# Altium PCB IMTM-Left-PCB04.PcbDoc
Units mm, origin at the board's own origin, x right, y up, seen from the top; angles counter-clockwise.
Board outline 206.22 x 62.12 mm, 2 copper layers (Top Layer, Bottom Layer), stack 0.096 mm thick; 6 components, 7 nets, 14 pads, 0 vias.
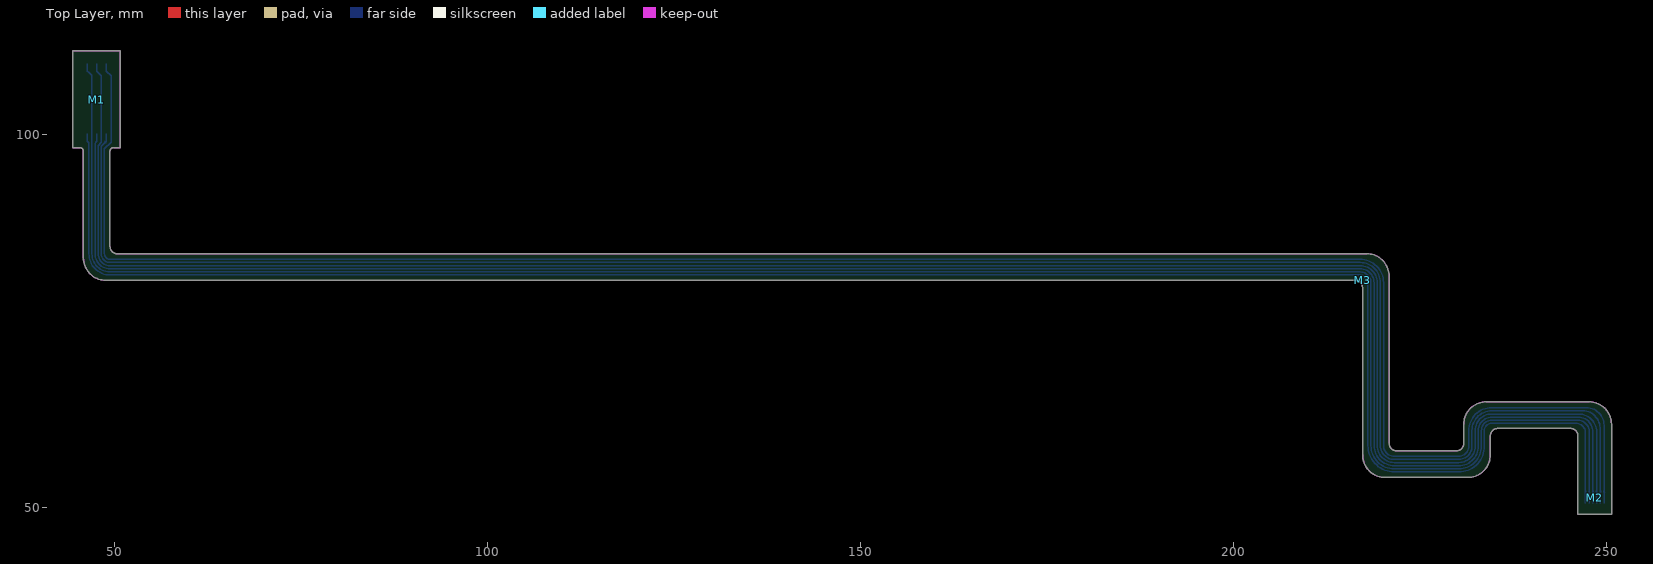
[diagram p0: Top Layer view]
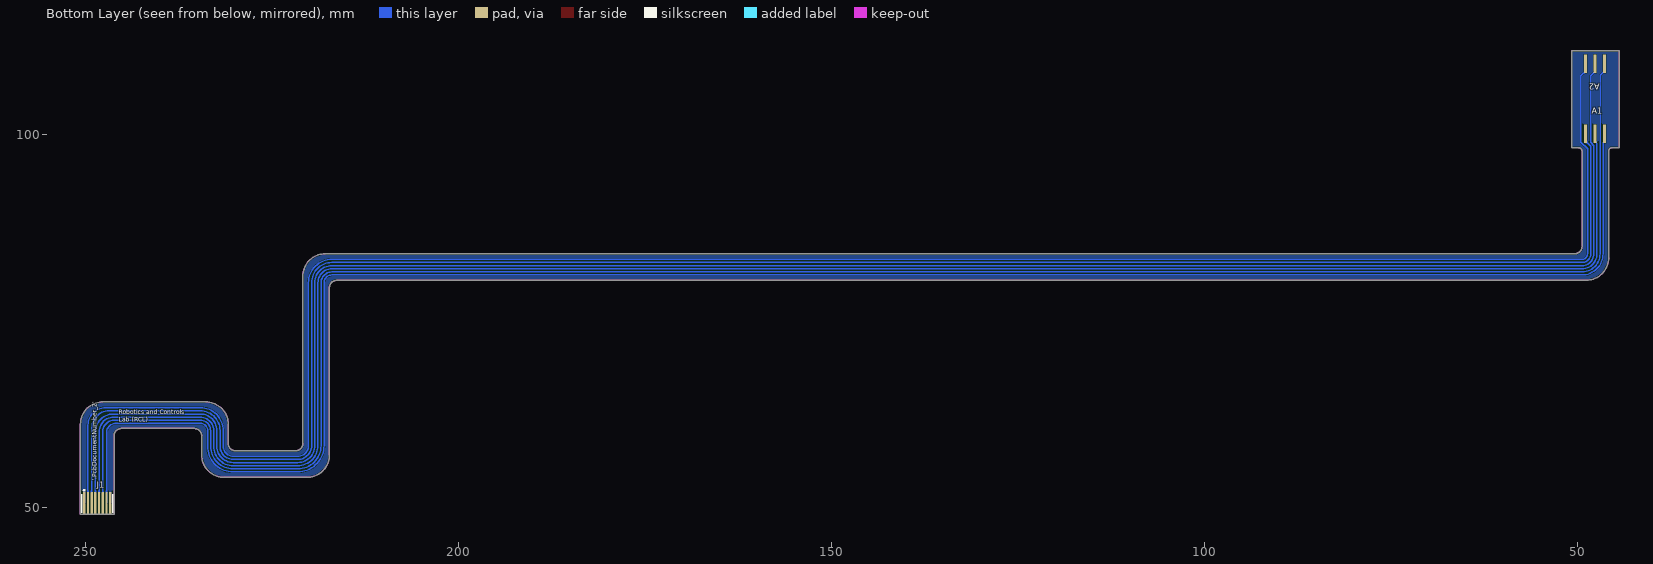
[diagram p1: Bottom Layer view, seen from below]

## Layer stack, top to bottom
Flex Top Coverlay: solder mask 0.05, PI + Adhesive, Dk 3.4
Top Layer: signal copper 0.0356
Polyimide: dielectric 0.025, Adhesive + PI, Dk 3.4
Bottom Layer: signal copper 0.0356
Flex Bottom Coverlay: solder mask 0.05, PI + Adhesive, Dk 3.4

## Board outline
48.808,80.431 cw(c48.808,83.431) 45.808,83.431 45.808,97.711 ccw(c45.308,97.711) 45.308,98.211 44.411,98.211 44.411,111.165 50.761,111.165 50.761,98.211 49.864,98.211 ccw(c49.864,97.711) 49.364,97.711 49.364,84.987 ccw(c50.364,84.987) 50.364,83.987 217.814,83.987 cw(c217.814,80.987) 220.814,80.987 220.814,58.571 ccw(c221.814,58.571) 221.814,57.571 229.814,57.571 ccw(c229.814,58.571) 230.814,58.571 230.814,61.131 cw(c233.814,61.131) 233.814,64.131 247.626,64.131 cw(c247.626,61.131) 250.626,61.131 250.626,49.043 246.126,49.043 246.126,59.571 ccw(c245.126,59.571) 245.126,60.571 235.374,60.571 ccw(c235.374,59.571) 234.374,59.571 234.374,57.015 cw(c231.374,57.015) 231.374,54.015 220.258,54.015 cw(c220.258,57.015) 217.258,57.015 217.258,79.431 ccw(c216.258,79.431) 216.258,80.431
board region FPC: 250.626,53.537 250.626,49.043 246.126,49.043 246.126,53.537
board region HLE: 45.808,97.211 45.808,97.711 45.798,97.809 45.724,97.989 45.586,98.127 45.406,98.201 45.308,98.211 44.411,98.211 44.411,111.165 50.761,111.165 50.761,98.211 49.864,98.211 49.766,98.201 49.586,98.127 49.448,97.989 49.374,97.809 49.364,97.711 49.364,97.211
board region Flex2: 220.814,73.5 220.814,58.571 220.819,58.473 220.857,58.281 220.932,58.1 221.041,57.937 221.18,57.798 221.343,57.689 221.524,57.614 221.716,57.576 221.814,57.571 229.814,57.571 229.912,57.576 230.104,57.614 230.285,57.689 230.448,57.798 230.587,57.937 230.696,58.1 230.771,58.281 230.809,58.473 230.814,58.571 230.814,61.131 230.814,61.328 230.865,61.718 230.967,62.097 231.118,62.461 231.314,62.801 231.554,63.113 231.832,63.391 232.144,63.631 232.484,63.827 232.848,63.978 233.227,64.08 233.617,64.131 233.814,64.131 247.626,64.131 247.823,64.131 248.213,64.08 248.592,63.978 248.956,63.827 249.296,63.631 249.608,63.391 249.886,63.113 250.126,62.801 250.322,62.461 250.473,62.097 250.575,61.718 250.626,61.328 250.626,61.131 250.626,60.571 245.126,60.571 235.374,60.571 235.276,60.566 235.084,60.528 234.903,60.453 234.74,60.344 234.601,60.205 234.492,60.042 234.417,59.861 234.379,59.669 234.374,59.571 234.374,57.015 234.374,56.818 234.323,56.428 234.221,56.049 234.07,55.685 233.874,55.345 233.634,55.033 233.356,54.755 233.044,54.515 232.704,54.319 232.34,54.168 231.961,54.066 231.571,54.015 231.374,54.015 220.258,54.015 220.061,54.015 219.671,54.066 219.292,54.168 218.928,54.319 218.588,54.515 218.276,54.755 217.998,55.033 217.758,55.345 217.562,55.685 217.411,56.049 217.309,56.428 217.258,56.818 217.258,57.015 217.258,73.501
board region Flex1: 246.126,53.537 246.126,59.571 246.121,59.669 246.083,59.861 246.008,60.042 245.899,60.205 245.76,60.344 245.597,60.453 245.416,60.528 245.224,60.566 245.126,60.571 250.626,60.571 250.626,53.537
board region Flex2: 210.097,80.431 48.808,80.431 48.611,80.431 48.221,80.482 47.842,80.584 47.478,80.735 47.138,80.931 46.826,81.171 46.548,81.449 46.308,81.761 46.112,82.101 45.961,82.465 45.859,82.844 45.808,83.234 45.808,83.431 45.808,97.211 49.364,97.211 49.364,84.987 49.369,84.889 49.407,84.697 49.482,84.516 49.591,84.353 49.73,84.214 49.893,84.105 50.074,84.03 50.266,83.992 50.364,83.987 210.1,83.987
board region Flex2: 217.258,73.501 217.258,79.431 217.253,79.529 217.215,79.721 217.14,79.902 217.031,80.065 216.892,80.204 216.729,80.313 216.548,80.388 216.356,80.426 216.258,80.431 210.097,80.431 210.1,83.987 217.814,83.987 218.011,83.987 218.401,83.936 218.78,83.834 219.144,83.683 219.484,83.487 219.796,83.247 220.074,82.969 220.314,82.657 220.51,82.317 220.661,81.953 220.763,81.574 220.814,81.184 220.814,80.987 220.814,73.5

## Design rules (kind name [scope] priority, off if disabled: settings)
Clearance [All] p1: gap=0.1 ignorepadtopadclearanceinfootprint=FALSE
ComponentClearance [All] p1: gap=0.1 collisioncheckmode=3 verticalgap=0.254 showdistances=FALSE
FabricationTestPointUsage TestPointUsage [All] p1: valid=0 allowmultiple=FALSE
FabricationTestpoint Testpoint [All] p1: side=3 testpointundercomponent=TRUE minsize=1.016 maxsize=2.54 preferedsize=1.524 minholesize=0 maxholesize=1.016 preferedholesize=0.813 testpointgrid=0.025 allowsidetop=TRUE allowsidebottom=TRUE usegrid=TRUE gridtolerance=0
PolygonConnect [All] p1: connectstyle=Relief reliefconductorwidth=0.254 reliefentries=4 polygonreliefangle="90 Angle" airgapwidth=0.254
RoutingVias [All] p1: holewidth=0.711 width=1.27 viastyle="Through Hole" minholewidth=0.711 minwidth=1.27 maxholewidth=0.711 maxwidth=1.27
SilkToSolderMaskClearance SilkscreenOverComponentPads [IsPad] p1: minsilkscreentomaskgap=0.254 clearancetoexposedcopper=TRUE
SolderMaskExpansion [All] p1: expansion=0.102
Width [All] p1: maxlimit=0.175 minlimit=0.175 preferedwidth=0.175
26 further rules are at their usual default settings.

## Components (designator, comment, footprint, x,y, rotation, side; value= is the part's Value field where it differs from the comment)
A1 "A1324LUA-T" A1324LUA-T 47.626,100.171 r180 bottom
A2 "A1324LUA-T" A1324LUA-T 47.626,109.371 r0 bottom
J1 "687108182122_matingPad" 687108182122_MATINGPAD 248.376,50.537 r180 bottom
M1 "Stiffener,HLE,PI,0.15mm" HLE_stiffener 47.58,104.633 r0 top
M2 "Stiffener,FPC,PI,0.15mm" FPC_STIFFENER 248.37,51.287 r0 top
M3 "Stiffener,CRN,PI,0.15mm" CRN_STIFFENER 217.258,80.431 r0 top

## Footprints (in the part's own frame and the unit in brackets; to place one, negate y for a bottom-side part, rotate by r counter-clockwise, add the part's x,y. Pads: shape width x height; smd on the part's side, far side on the other; paste and mask are expansions set on the pad)
687108182122_MATINGPAD [mm]
  rect 0.3x3 smd mask+0: 1(-1.75,0) 2(-1.25,0) 3(-0.75,0) 4(-0.25,0) 5(0.25,0) 6(0.75,0) 7(1.25,0) 8(1.75,0)
  silkscreen extent -2.1,-1.25 2.1,1.82
A1324LUA-T [mm]
  rect 0.45x2.5 smd: 1(-1.27,-0.1) 2(0,-0.1) 3(1.27,-0.1)
  body extent -2.1,1.42 2.1,4.5, height 1.57
CRN_STIFFENER [mm]
  body extent -7.15,-6.95 3.55,3.55, height 0.25
FPC_STIFFENER [mm]
  body extent -2.25,-2.25 3,2.25, height 0.25
HLE_stiffener [mm]
  body extent -3.18,-7.42 3.17,6.54, height 0.15

## Part data
A1 A2: "ALLEGRO MICROSYSTEMS - A1324LUA-T - Hall Effect Sensor, Linear, 10 mA, SIP, 3 Pins, 4.5 V, 5.5 V", Case/Package=SIP, Manufacturer="Allegro MicroSystems", Max Operating Temperature=150°C, Max Output Current=10mA, Max Supply Current=9mA, Max Supply Voltage=5.5V, Min Operating Temperature=-40°C, Min Supply Voltage=4.5V, Operating Supply Voltage=5V, Package Quantity=4000, Supplier Part Number 1=620-1432-ND, Category=Sensors, ComponentLink1Description=https://datasheet.ciiva.com/15099/getdatasheetpartid-367817-15099484.pdf?src-supplier=Verical, ComponentLink1URL=https://datasheet.ciiva.com/15099/getdatasheetpartid-367817-15099484.pdf?src-supplier=Verical, ComponentLink2Description=https://datasheet.ciiva.com/22624/1538021-22624823.pdf?src-supplier=Element14, ComponentLink2URL=https://datasheet.ciiva.com/22624/1538021-22624823.pdf?src-supplier=Element14, ComponentLink3Description=https://datasheet.ciiva.com/14094/a1324-26-eng-tds-14094701.pdf?src-supplier=Distrelec, ComponentLink3URL=https://datasheet.ciiva.com/14094/a1324-26-eng-tds-14094701.pdf?src-supplier=Distrelec, Height=3.02mm, Length=4.09mm, Manufacturer Part Number=A1324LUA-T, Mount="Through Hole", Number of Pins=3, Operating Supply Current=9mA, Output Current=10mA, Output Type=Digital, Packaging=Bag, Pricing 1="1=2.00000, 5=1.89000, 10=1.62000, 25=1.29600, 50=1.18800, 100=1.08000, 500=0.94500, 1000=0.83700, 5000=0.78300 (USD)", Radiation Hardening=No, REACH SVHC="No SVHC", RoHS=Yes, Stock 1=15828, Supplier 1=Digi-Key, Width=1.52mm
M1: library part HLE_stiffener, "MECH,Stiffener,IMTM-PCB03_04,HLE", CreatedBy="A. Hadi"
M2: library part FPC_STIFFENER, "MECH,Stiffener,IMTM-PCB03_04,FPC", CreatedBy="A. Hadi"
M3: "MECH,Stiffener,IMTM-PCB03_04,CRN"

## Nets (pads, with @x,y where several pads share a name; then routed paths per layer and width w, separated by ;. In a path a pad name is that pad's centre, name@x,y a point inside that pad or via, vN(x,y) a via of type N, cw(c..) or ccw(c..) an arc to the next point about the centre after c; other vN are vias at no path point)
HLE1_GND: A1.2 J1.5 | length 257.9
  Bottom Layer w0.175: A1.2 47.626,99.046 47.489,98.908 47.472,98.908 47.369,98.806 47.369,83.969 ccw(c49.366,83.969) 49.366,81.973 216.922,81.973 cw(c216.922,80.095) 218.8,80.095 218.8,58.28 ccw(c221.5,58.28) 221.5,55.579 230.156,55.579 ccw(c230.156,58.183) 232.76,58.183 232.76,60.297 cw(c234.551,60.297) 234.551,62.087 246.186,62.087 cw(c246.149,60.11) 248.126,60.11 J1.5
HLE1_VCC: A1.1 J1.3 | length 258.4
  Bottom Layer w0.175: A1.1 48.896,99.046 48.759,98.908 48.715,98.908 48.212,98.405 48.212,83.969 ccw(c49.366,83.969) 49.366,82.816 216.922,82.816 cw(c216.922,80.095) 219.643,80.095 219.643,58.28 ccw(c221.5,58.28) 221.5,56.423 230.156,56.423 ccw(c230.156,58.183) 231.917,58.183 ; 231.917,58.183 231.917,60.297 cw(c234.551,60.297) 234.551,62.931 246.823,62.931 cw(c246.823,60.772) 248.352,62.296 cw(c246.475,60.424) 249.126,60.424 249.126,60.423 J1.3
HLE1_VOUT: A1.3 J1.7 | length 257.6
  Bottom Layer w0.175: A1.3 46.356,99.046 46.547,98.855 46.547,83.969 ccw(c49.366,83.969) 49.366,81.15 216.922,81.15 cw(c216.922,80.095) 217.977,80.095 217.977,58.28 ccw(c221.5,58.28) 221.5,54.757 230.156,54.757 ccw(c230.156,58.183) 233.582,58.183 233.582,60.297 cw(c234.551,60.297) 234.551,61.265 245.847,61.265 cw(c245.847,59.986) 247.126,59.986 J1.7
HLE2_GND: A2.2 J1.4 | length 267.6
  Bottom Layer w0.175: A2.2 47.626,108.446 48.212,107.86 48.212,98.917 47.791,98.495 47.791,83.969 ccw(c49.366,83.969) 49.366,82.394 216.922,82.394 cw(c216.922,80.095) 219.221,80.095 219.221,58.28 ccw(c221.5,58.28) 221.5,56.001 230.156,56.001 ccw(c230.156,58.183) 232.338,58.183 232.338,60.297 cw(c234.551,60.297) 234.551,62.509 246.213,62.509 cw(c246.213,60.096) 248.626,60.096 J1.4
HLE2_VCC: A2.1 J1.6 | length 267.4
  Bottom Layer w0.175: A2.1 46.356,108.446 46.494,108.309 46.537,108.309 46.947,107.898 46.947,83.969 ccw(c49.366,83.969) 49.366,81.551 216.922,81.551 cw(c216.922,80.095) 218.378,80.095 218.378,58.28 ccw(c221.5,58.28) 221.5,55.158 230.156,55.158 ccw(c230.156,58.183) 233.182,58.183 233.182,60.297 cw(c234.551,60.297) 234.551,61.666 246.134,61.666 cw(c246.134,60.173) 247.626,60.173 J1.6
HLE2_VOUT: A2.3 J1.2 | length 268.4
  Bottom Layer w0.175: A2.3 48.896,108.446 49.51,107.832 49.51,98.945 48.634,98.069 48.634,83.969 ccw(c49.366,83.969) 49.366,83.238 216.922,83.238 cw(c216.922,80.095) 220.065,80.095 220.065,58.28 ccw(c221.5,58.28) 221.5,56.844 230.156,56.844 ccw(c230.156,58.183) 231.495,58.183 231.495,60.297 ; 231.495,60.297 cw(c234.551,60.297) 234.551,63.352 247.255,63.352 cw(c247.255,60.981) 249.626,60.981 J1.2
HLE_GNDPLN: J1.1 J1.8

## Polygon pours and split planes (outlines as drawn)
HLE_GNDPLN on Bottom Layer "HLE_GNDPLN_L02_P000" (solid, remove dead copper, pour order 0): 48.808,80.431 cw(c48.808,83.431) 45.808,83.431 45.808,97.711 ccw(c45.308,97.711) 45.308,98.211 44.411,98.211 44.411,111.165 50.761,111.165 50.761,98.211 49.864,98.211 ccw(c49.864,97.711) 49.364,97.711 49.364,84.987 ccw(c50.364,84.987) 50.364,83.987 217.814,83.987 cw(c217.814,80.987) 220.814,80.987 220.814,58.571 ccw(c221.814,58.571) 221.814,57.571 229.814,57.571 ccw(c229.814,58.571) 230.814,58.571 230.814,61.131 cw(c233.814,61.131) 233.814,64.131 247.626,64.131 cw(c247.626,61.131) 250.626,61.131 250.626,49.043 246.126,49.043 246.126,59.571 ccw(c245.126,59.571) 245.126,60.571 235.374,60.571 ccw(c235.374,59.571) 234.374,59.571 234.374,57.015 cw(c231.374,57.015) 231.374,54.015 220.258,54.015 cw(c220.258,57.015) 217.258,57.015 217.258,79.431 ccw(c216.258,79.431) 216.258,80.431

## Keep-outs
Keep-Out Layer:
  lines w0.15: 246.126,49.043 246.126,59.571 ccw(c245.126,59.571) 245.126,60.571 235.374,60.571 ccw(c235.374,59.571) 234.374,59.571 234.374,57.015 cw(c231.374,57.015) 231.374,54.015 220.258,54.015 cw(c220.258,57.015) 217.258,57.015 217.258,79.431 ccw(c216.258,79.431) 216.258,80.431 48.808,80.431 cw(c48.808,83.431) 45.808,83.431 45.808,97.711 ; 250.626,49.043 250.626,61.131 ; 45.308,98.211 cw(c45.308,97.711) 45.808,97.711 ; 45.308,98.211 44.411,98.211 44.411,111.165 50.761,111.165 50.761,98.211 49.864,98.211 ; 45.308,98.211 45.308,98.211 ; 45.808,97.711 45.808,97.711 ; 49.364,84.987 ccw(c50.364,84.987) 50.364,83.987 217.814,83.987 ; 49.364,84.987 49.364,84.987 ; 49.364,84.987 49.364,97.711 cw(c49.864,97.711) 49.864,98.211 ; 49.864,98.211 49.864,98.211 ; 217.814,83.987 cw(c217.814,80.987) 220.814,80.987 ; 217.814,83.987 217.814,83.987 ; 220.814,58.571 ccw(c221.814,58.571) 221.814,57.571 229.814,57.571 ccw(c229.814,58.571) 230.814,58.571 230.814,61.131 cw(c233.814,61.131) 233.814,64.131 247.626,64.131 cw(c247.626,61.131) 250.626,61.131 ; 220.814,58.571 220.814,58.571 ; 220.814,58.571 220.814,80.987 ; 220.814,80.987 220.814,80.987 ; 250.626,61.131 250.626,61.131

## Silkscreen, mask and mechanical layers (free items; w line width, h text height)
Flex Bottom Overlay:
  text "Robotics and Controls / Lab (RCL)" at 245.49,61.265 h1
  text "'.PcbDocumentNumber_2'" at 248.254,53.565 h1 r270
DXF Board Layout:
  the board outline again, w0.013
Split Lines:
  lines w0.013: 45.808,97.211 49.364,97.211 ; 246.126,53.543 250.626,53.543
Mech Dimensions:
  text "All outer corner radii are 3.00 mm" at 29.82,71.346 h3.5
  text "All inner corner radii / are 1.00 mm" at 177.126,70.371 h3.5
Drill Drawing:
  drawing of 533 lines, arcs and shapes, not listed
  text "Layer" at 130.958,182.627 h1.52
  text "Name" at 141.369,182.627 h1.52
  text "Material" at 173.872,182.627 h1.52
  text "Thickness" at 196.218,182.627 h1.52
  text "Constant" at 212.724,182.627 h1.52
  text "Generic" at 227.198,182.627 h1.52
  text "Flex" at 240.657,182.627 h1.52
  text "Polymide Stiffener" at 253.608,182.627 h1.52
  text "Flex Top Overlay" at 141.369,179.579 h1.52
  text "Flex Top Coverlay" at 141.369,176.531 h1.52
  text "PI + Adhesive" at 173.872,176.531 h1.52
  text "0.050mm" at 196.218,176.531 h1.52
  text "3.4" at 212.724,176.531 h1.52
  text "1" at 130.958,173.483 h1.52
  text "Top Layer" at 141.369,173.483 h1.52
  text "Copper" at 173.872,173.483 h1.52
  text "0.036mm" at 196.218,173.483 h1.52
  text "Polyimide" at 141.369,170.435 h1.52
  text "Adhesive + PI" at 173.872,170.435 h1.52
  text "0.025mm" at 196.218,170.435 h1.52
  text "3.4" at 212.724,170.435 h1.52
  text "2" at 130.958,167.387 h1.52
  text "Bottom Layer" at 141.369,167.387 h1.52
  text "Copper" at 173.872,167.387 h1.52
  text "0.036mm" at 196.218,167.387 h1.52
  text "Flex Bottom Coverlay" at 141.369,164.339 h1.52
  text "PI + Adhesive" at 173.872,164.339 h1.52
  text "0.050mm" at 196.218,164.339 h1.52
  text "3.4" at 212.724,164.339 h1.52
  text "Flex Bottom Overlay" at 141.369,161.291 h1.52
  text "Polyimide" at 13.529,143.75 h1
  text "25 um" at 51.126,142.084 h1
  text "Adhesive" at 13.626,141.121 h1
  text "Polyimide" at 83.382,141.009 h1
  text "0.12 mm" at 106.153,138.431 h1 r90
  text "Base Copper" at 13.626,138.371 h1
  text "36 um" at 41.658,138.204 h1
  text "Coverlay Adhesive" at 13.626,135.869 h1
  text "35 um" at 41.658,135.727 h1
  text "Polyimide" at 13.626,133.121 h1
  text "25 um" at 41.658,132.978 h1
  text "Flex Circuit" at 68.5,132.9 h1 r90
  text "FINISHED THICKNESS" at 62.151,132.062 h1 r90
  text "0.15 mm" at 109.2,131.9 h1 r90
  text "121 um +/- 10 um" at 64.151,131.662 h1 r90
  text "FINISHED THICKNESS" at 120.788,131.587 h1 r90
  text "0.3 mm +/- 0.05 mm" at 118.699,130.14 h1 r90
  text "Flex Layer Stack Detail" at 16.848,128.729 h2
  text "Polyimide Stiffener Detail" at 67.179,128.229 h2
  text "NOT TO SCALE" at 37.796,125.979 h1
  text "NOT TO SCALE" at 91.27,125.479 h1
Titleblock:
  lines w0.127: 0,48.26 5.08,48.26 ; 0,96.52 5.08,96.52 ; 0,144.78 5.08,144.78 ; 73.025,0 73.025,5.08 ; 73.025,187.96 73.025,193.04 ; 146.05,0 146.05,5.08 ; 146.05,187.96 146.05,193.04 ; 172.72,12.7 287.02,12.7 ; 172.72,20.32 287.02,20.32 ; 172.72,27.94 210.82,27.94 ; 210.82,5.08 210.82,20.32 210.82,35.56 ; 219.075,0 219.075,5.08 ; 219.075,187.96 219.075,193.04 ; 264.16,5.08 264.16,20.32 ; 287.02,48.26 292.1,48.26 ; 287.02,96.52 292.1,96.52 ; 287.02,144.78 292.1,144.78 ; 172.72,5.08 172.72,35.56 ; 172.72,5.08 137.16,5.08 137.16,35.56 172.72,35.56 ; 172.72,5.08 287.02,5.08 ; 172.72,35.56 210.82,35.56 ; 210.82,35.56 287.02,35.56 287.02,5.08 ; 287.02,5.08 287.02,187.96 5.08,187.96 5.08,5.08 287.02,5.08 ; 0,0 0,193.04 292.1,193.04 292.1,0 0,0
  text "1" at 36.246,189.611 h1.78
  text "2" at 108.89,189.611 h1.78
  text "3" at 182.042,189.611 h1.78
  text "4" at 254.94,189.611 h1.78
  text "NOTES:" at 12.641,182.403 h2
  text "1." at 12.641,180.403 h2
  text "Dimensions are in mm unless specified otherwise.  Tolerances are as indicated on Dimensions layer unless otherwise noted." at 15.641,180.403 h2
  text "2." at 12.641,178.403 h2
  text "All dimensional limits apply after plating or processing." at 15.641,178.403 h2
  text "3." at 12.641,176.403 h2
  text "Refer to drill table for hole size tolerances." at 15.641,176.403 h2
  text "4." at 12.641,174.403 h2
  text "Hole / slot plating to be 0.001\" minimum average and 0.0008\" absolute minimum." at 15.641,174.403 h2
  text "Hole / slot diameters are specified after plating." at 15.641,172.403 h2
  text "5." at 12.641,170.403 h2
  text "Thickness and tolerances for flex circuit and stiffeners are as indicated on Layer Stack detail." at 15.641,170.403 h2
  text "6." at 12.641,168.403 h2
  text "Base Materials:" at 15.641,168.403 h2
  text "As noted in layer stack." at 27.641,168.403 h2
  text "A" at 1.905,166.599 h1.78
  text "A" at 288.925,166.599 h1.78
  text "7." at 12.641,166.403 h2
  text "Coverlay:" at 15.641,166.403 h2
  text "As noted in layer stack.  Registration to be within +/- 0.003 of respective signal layers." at 27.641,166.403 h2
  text "8." at 12.641,164.403 h2
  text "Silkscreen:" at 15.641,164.403 h2
  text "White non-conductive ink (top and bottom).  No ink to appear on exposed copper." at 27.641,164.403 h2
  text "9." at 12.641,162.403 h2
  text "Finish:" at 15.641,162.403 h2
  text "Electroless Nickel Immersion Gold (ENIG).  Finish both sides with 150 micro inches" at 27.641,162.403 h2
  text "minimum electroless Nickel (Ni) followed by minimum 2 microinches immersion Gold (Au)." at 27.641,160.403 h2
  text "10." at 12.641,158.403 h2
  text "Electrical Test:" at 15.641,158.403 h2
  text "Perform 100% continuity and isolation testing per current IPC test methods." at 27.641,158.403 h2
  text "11." at 12.641,156.403 h2
  text "Controlled impedance is not required." at 15.641,156.403 h2
  text "12." at 12.641,154.403 h2
  text "Do not panelize.  Supply as individual flexible PCBs." at 15.641,154.403 h2
  text "The FPC is single layer with all the components and traces on the Base Copper layer and the PI stiffeners on the top" at 12.781,147.26 h2
  text "B" at 1.905,118.542 h1.78
  text "B" at 288.925,118.542 h1.78
  text "C" at 1.905,70.028 h1.78
  text "C" at 288.925,70.028 h1.78
  text "ENGINEER:" at 173.99,33.02 h1.14
  text "TITLE:" at 212.09,33.02 h1.14
  text "Tolerances unless otherwise specified:" at 94.531,32.35 h1.52
  text "Robotics and Controls" at 139.604,31.05 h3.18
  text ".ProjectTitle" at 219.885,29.553 h6.35
  text ".X +/- 0.20" at 99.865,29.175 h1.52
  text "'.DrawnBy'" at 174.876,29.121 h3.17
  text "'.DrawnDate'" at 194.126,29.118 h3.17
  text "Laboratory (RCL)" at 139.604,27.8 h3.18
  text ".XX +/- 0.10" at 98.468,26.635 h1.52
  text "PCB DESIGNER:" at 173.99,25.527 h1.14
  text "'.DocumentTitle'" at 219.885,25.501 h3.81
  text ".XXX +/- 0.05" at 97.071,24.095 h1.52
  text "D" at 1.905,22.022 h1.78
  text "D" at 288.925,22.022 h1.78
  text "'.DrawnBy'" at 174.712,21.754 h3.17
  text "'.DrawnDate'" at 193.962,21.751 h3.17
  text "DATE:" at 173.99,17.78 h1.14
  text "PART NO.:" at 212.09,17.78 h1.14
  text "REV:" at 265.43,17.78 h1.14
  text "3090 Kaiser Building" at 140.97,15.24 h3.17
  text "'.PcbDocumentNumber_2'" at 222.876,14.621 h3.17
  text ".PRINT_DATE" at 175.876,14.371 h3.17
  text "'.Rev'" at 265.498,13.979 h3.17
  text "2332 Main Mall" at 140.97,12.7 h3.17
  text "Vancouver, BC" at 140.97,10.16 h3.17
  text "FILE NAME:" at 173.99,10.16 h1.14
  text "DWG NO:" at 212.09,10.16 h1.14
  text "SCALE:" at 265.43,10.16 h1.14
  text "V6J 1R6" at 140.97,7.62 h3.17
  text ".PCB_FILE_NAME_NO_PATH" at 173.626,6.871 h3.17
  text "'.PcbDocumentNumber_2'" at 222.376,6.871 h3.17
  text "1:1" at 265.582,6.037 h3.17
  text "1" at 36.246,1.651 h1.78
  text "2" at 108.89,1.651 h1.78
  text "3" at 182.042,1.651 h1.78
  text "4" at 254.94,1.651 h1.78

## Dimensions
217.814,83.987 to 220.497,73.5 on Flex Bottom Overlay
210.1,83.67 to 220.814,80.987 on Flex Bottom Overlay
101.496,132.371 to 101.495,144.3 on Drill Drawing
101.495,138.431 to 101.495,144.3 on Drill Drawing
101.465,138.008 to 101.496,132.371 on Drill Drawing
48.029,145.25 to 48.051,140.371 on Drill Drawing
48.029,145.25 to 48.126,132.371 on Drill Drawing
245.376,49.043 to 245.376,53.543 on Mech Dimensions
216.258,79.431 to 214.935,74.651 on Mech Dimensions
48.808,83.431 to 44.729,77.114 on Mech Dimensions
44.411,111.165 to 250.626,49.043 on Mech Dimensions
234.374,59.571 to 44.411,111.165 on Mech Dimensions
44.411,111.165 to 220.814,80.987 on Mech Dimensions
246.126,49.043 to 250.626,49.043 on Mech Dimensions
233.814,64.131 to 235.374,60.571 on Mech Dimensions
221.814,57.571 to 220.258,54.015 on Mech Dimensions
217.258,79.431 to 220.814,80.987 on Mech Dimensions
50.364,83.987 to 48.808,80.431 on Mech Dimensions
44.411,111.165 to 235.374,60.571 on Mech Dimensions
44.411,111.165 to 246.126,49.043 on Mech Dimensions
44.411,111.165 to 220.258,54.015 on Mech Dimensions
44.411,111.165 to 48.808,80.431 on Mech Dimensions
49.864,97.711 to 50.19,97.663 on Mech Dimensions
49.364,84.987 to 45.808,97.711 on Mech Dimensions
50.761,111.165 to 44.411,111.165 on Mech Dimensions
44.411,111.165 to 45.308,98.211 on Mech Dimensions